# Altium PCB bdcmc25_revised.PcbDoc (part 4 of 4)
Units mm, origin at the board's own origin, x right, y up, seen from the top; angles counter-clockwise.
Board outline 177.8 x 69.85 mm, 4 copper layers (Top Layer, Layer 2 (GND), Layer 3 (GND), Bottom Layer), stack 0.603 mm thick; 363 components, 158 nets, 1074 pads, 732 vias.
Unrouted connection lines stored in the file: 6.
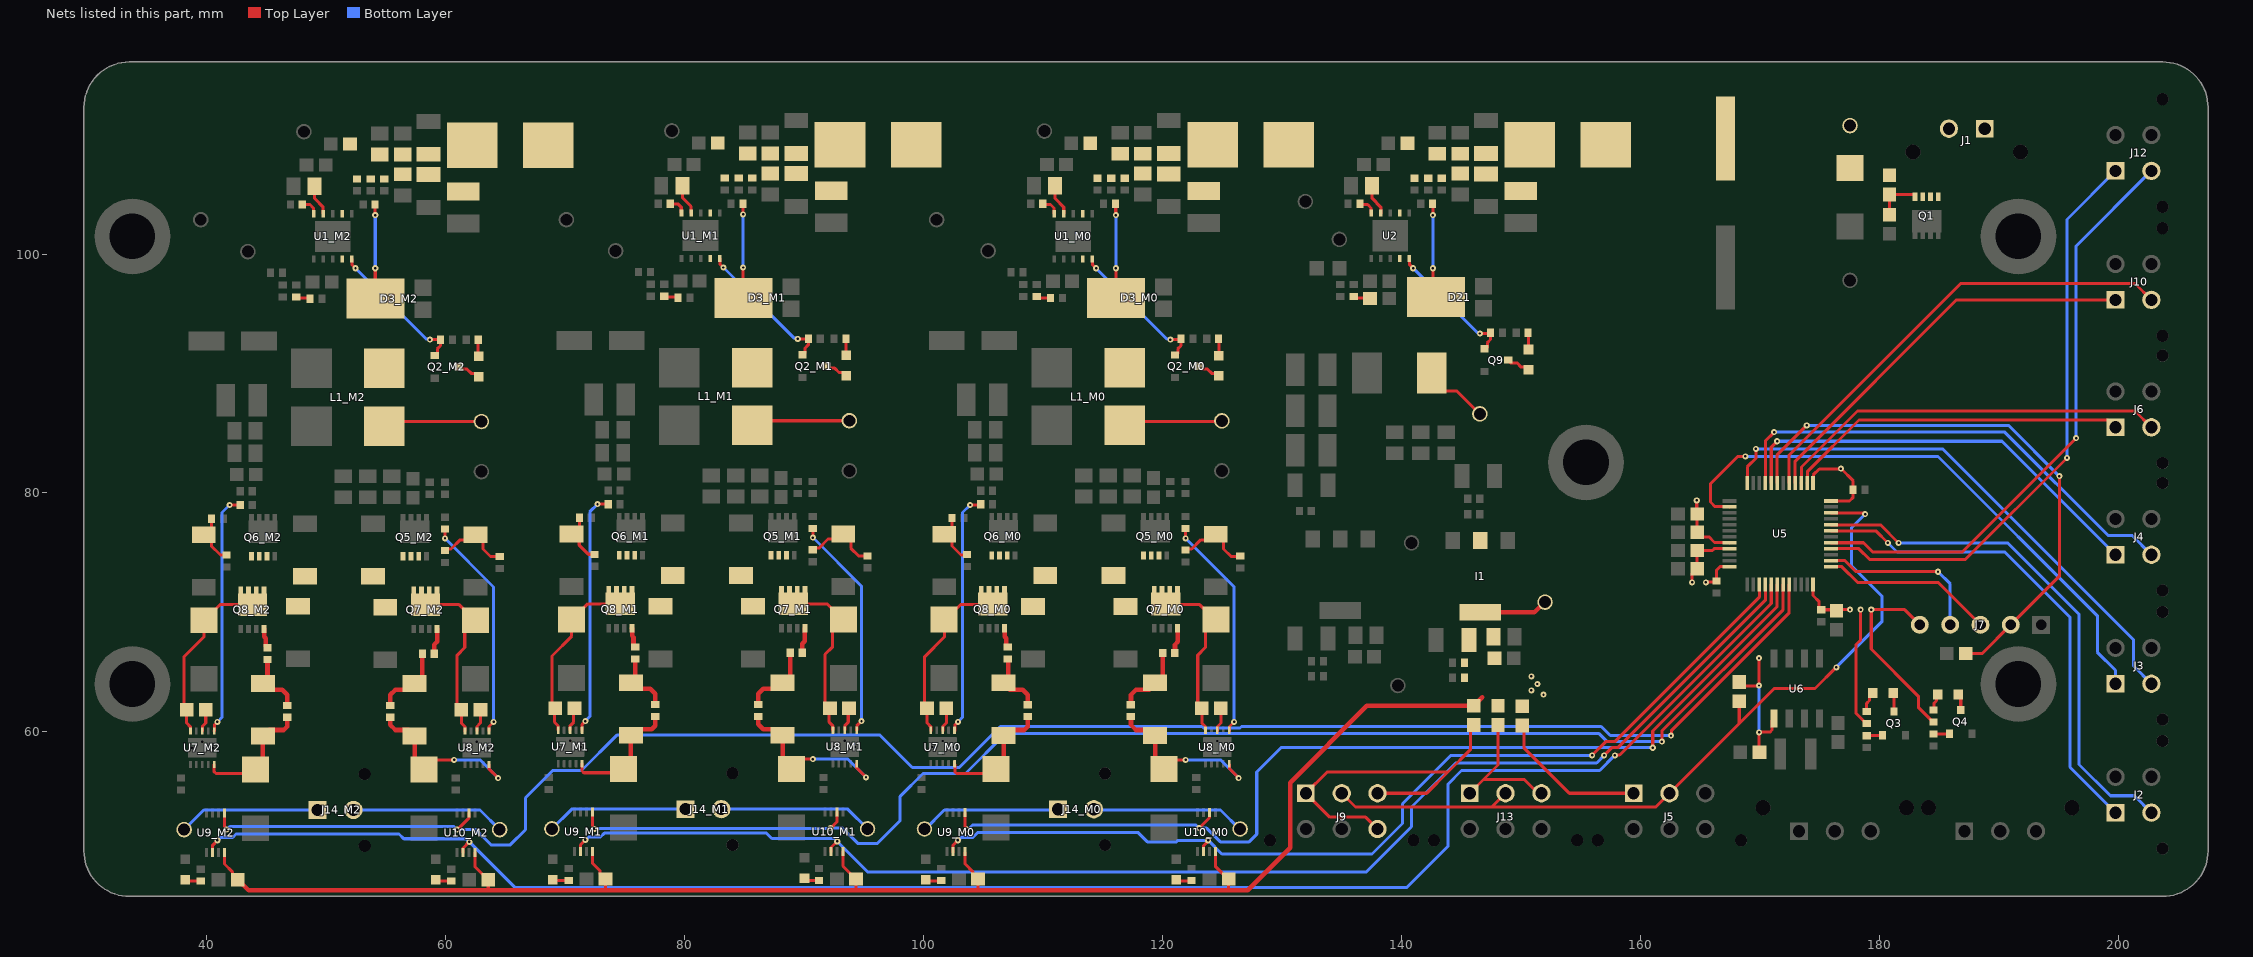
[diagram p5: the nets of this part, all layers, seen from the top]

## Via types
v1: diameter 0.508, hole 0.203, Top Layer to Bottom Layer, 717 vias
v2: diameter 0.508, hole 0.2, Top Layer to Bottom Layer, 15 vias

## Nets (pads, with @x,y where several pads share a name; then routed paths per layer and width w, separated by ;. In a path a pad name is that pad's centre, name@x,y a point inside that pad or via, vN(x,y) a via of type N, cw(c..) or ccw(c..) an arc to the next point about the centre after c; other vN are vias at no path point) (continued)
I2C1_SDA: J5.2 J9.2 J13.2 R14.2 U5.46 | length 69
  Top Layer w0.254: J9.2@135.001,54.864 136.147,53.718 147.571,53.718 ; J13.2@148.717,54.864 147.571,53.718 ; R14.2@168.275,62.573 168.275,60.706 ; U5.46@175.954,78.331 178.676,78.331 178.775,78.232 v1(178.816,78.232) ; v1(176.403,65.405) 174.625,63.627 171.196,63.627 168.275,60.706 ; 147.571,53.718 161.287,53.718 J5.2@162.433,54.864 168.275,60.706
  Bottom Layer w0.254: v1(176.403,65.405) 180.213,69.215 180.213,71.374 177.673,73.914 177.673,77.089 v1(178.816,78.232)
LIMIT_0_A: J6.1@199.771,85.495 U5.2 | length 28.8
  Top Layer w0.254: U5.2@173.954,80.831 173.979,80.856 173.979,81.777 178.308,86.106 199.16,86.106 J6.1@199.771,85.495
LIMIT_0_B: J6.3 U5.3 | length 33.2
  Top Layer w0.254: U5.3@173.454,80.831 173.479,80.856 173.479,82.166 178.181,86.868 201.398,86.868 J6.3@202.771,85.495
LIMIT_1_A: J10.1@199.771,96.163 U5.4 | length 34.2
  Top Layer w0.254: U5.4@172.954,80.831 172.954,82.657 186.46,96.163 J10.1@199.771,96.163
LIMIT_1_B: J10.3 U5.5 | length 39.2
  Top Layer w0.254: U5.5@172.454,80.831 172.454,83.173 186.817,97.536 201.398,97.536 J10.3@202.771,96.163
LIMIT_2_A: J12.1@199.771,106.958 U5.40 | length 49.4
  Top Layer w0.254: U5.40@175.954,75.331 178.288,75.331 179.197,74.422 187.198,74.422 v1(195.707,82.931)
  Bottom Layer w0.254: v1(195.707,82.931) 195.707,102.894 J12.1@199.771,106.958
LIMIT_2_B: J12.3 U5.41 | length 49.8
  Top Layer w0.254: U5.41@175.954,75.831 178.677,75.831 179.451,75.057 186.944,75.057 v1(196.469,84.582)
  Bottom Layer w0.254: v1(196.469,84.582) 196.469,100.656 J12.3@202.771,106.958
LO_1G_M0: D10_M0.2 D12_M0.2 R28_M0.1 U7_M0.10 | length 10.4
  Top Layer w0.254: U7_M0.10@102.613,57.274 102.613,56.664 102.761,56.515 105.606,56.515 D12_M0.2@105.931,56.84
  Top Layer w0.381: D12_M0.2@105.931,56.84 106.693,57.602 106.693,59.649 107.202,60.159 108.431,60.159 108.725,60.452 R28_M0.1@108.725,61.222
LO_1G_M1: D10_M1.2 D12_M1.2 R28_M1.1 U7_M1.10 | length 10.4
  Top Layer w0.254: U7_M1.10@71.417,57.339 71.417,56.729 71.566,56.58 74.41,56.58 D12_M1.2@74.735,56.905
  Top Layer w0.381: D12_M1.2@74.735,56.905 75.497,57.667 D10_M1.2@75.497,59.714 76.007,60.224 77.236,60.224 77.529,60.517 R28_M1.1@77.529,61.287
LO_1G_M2: D10_M2.2 D12_M2.2 R28_M2.1 U7_M2.10 | length 10.4
  Top Layer w0.254: U7_M2.10@40.624,57.274 40.624,56.664 40.773,56.515 43.617,56.515 D12_M2.2@43.942,56.84
  Top Layer w0.381: D12_M2.2@43.942,56.84 44.704,57.602 D10_M2.2@44.704,59.649 45.214,60.159 46.443,60.159 46.736,60.452 R28_M2.1@46.736,61.222
LO_1M_M0: Q8_M0.1 R30_M0.2 | length 1.7
  Top Layer w0.381: Q8_M0.1@106.786,68.612 106.795,68.603 106.795,67.969 106.914,67.851 106.914,67.157 107.024,67.048 R30_M0.2@107.074,67.048
LO_1M_M1: Q8_M1.1 R30_M1.2 | length 1.7
  Top Layer w0.381: Q8_M1.1@75.59,68.677 75.6,68.668 75.6,68.034 75.719,67.916 75.719,67.223 75.828,67.113 R30_M1.2@75.878,67.113
LO_1M_M2: Q8_M2.1 R30_M2.2 | length 1.7
  Top Layer w0.381: Q8_M2.1@44.797,68.612 44.807,68.603 44.807,67.969 44.925,67.851 44.925,67.157 45.035,67.048 R30_M2.2@45.085,67.048
LO_2G_M0: D11_M0.2 D15_M0.2 R29_M0.1 U8_M0.10 | length 14.8
  Top Layer w0.254: D15_M0.2@120.155,56.84 120.973,57.658 v1(121.933,57.658) ; U8_M0.10@125.6,57.274 125.6,56.912 v1(126.378,56.134)
  Top Layer w0.381: R29_M0.1@117.361,61.222 117.361,60.579 117.781,60.159 118.883,60.159 119.393,59.649 119.393,57.602 D15_M0.2@120.155,56.84
  Bottom Layer w0.254: v1(121.933,57.658) 124.854,57.658 v1(126.378,56.134)
LO_2G_M1: D11_M1.2 D15_M1.2 R29_M1.1 U8_M1.10 | length 14.8
  Top Layer w0.254: D15_M1.2@88.959,56.905 89.777,57.723 v1(90.737,57.723) ; U8_M1.10@94.404,57.339 94.404,56.977 v1(95.182,56.199)
  Top Layer w0.381: R29_M1.1@86.165,61.287 86.165,60.644 86.586,60.224 87.688,60.224 D11_M1.2@88.197,59.714 88.197,57.667 D15_M1.2@88.959,56.905
  Bottom Layer w0.254: v1(90.737,57.723) 93.658,57.723 v1(95.182,56.199)
LO_2G_M2: D11_M2.2 D15_M2.2 R29_M2.1 U8_M2.10 | length 14.8
  Top Layer w0.254: D15_M2.2@58.166,56.84 58.984,57.658 v1(60.706,57.658) ; U8_M2.10@63.611,57.274 63.611,56.912 v1(64.389,56.134)
  Top Layer w0.381: R29_M2.1@55.372,61.222 55.372,60.579 55.792,60.159 56.894,60.159 D11_M2.2@57.404,59.649 57.404,57.602 D15_M2.2@58.166,56.84
  Bottom Layer w0.254: v1(60.706,57.658) 62.865,57.658 v1(64.389,56.134)
LO_2M_M0: Q7_M0.1 R31_M0.1 | length 2.2
  Top Layer w0.381: R31_M0.1@121.036,66.548 121.044,66.556 121.044,67.31 121.264,67.53 Q7_M0.1@121.264,68.612
LO_2M_M1: Q7_M1.1 R31_M1.1 | length 2.2
  Top Layer w0.381: R31_M1.1@89.84,66.613 89.848,66.621 89.848,67.375 90.068,67.595 Q7_M1.1@90.068,68.677
LO_2M_M2: Q7_M2.1 R31_M2.1 | length 2.2
  Top Layer w0.381: R31_M2.1@59.047,66.548 59.055,66.556 59.055,67.31 59.275,67.53 Q7_M2.1@59.275,68.612
M+_M0: +. +.1 C60_M0.2 C60_M1.2 C60_M2.2 D8_M0.1 D8_M1.1 D8_M2.1 D13_M0.1 D13_M1.1 D13_M2.1 D16_M0.2 D16_M1.2 D16_M2.2 J14_M0.1@111.252,53.523 J14_M1.1@80.069,53.532 J14_M2.1@49.276,53.467 Q6_M0.2 Q6_M1.2 Q6_M2.2 Q8_M0.3 Q8_M1.3 Q8_M2.3 U7_M0.5 U7_M1.5 U7_M2.5 | length 79.9
  Top Layer w0.254: U7_M2.5@38.624,60.074 38.624,60.436 38.316,60.744 38.316,61.976 38.1,62.192 38.1,66.294 39.751,67.945 D13_M2.1@39.751,69.345 39.801,69.345 41.108,70.652 Q8_M2.3@43.822,70.652 ; U7_M1.5@69.417,60.139 69.417,60.501 69.109,60.809 69.109,62.041 68.893,62.257 68.893,66.359 70.544,68.01 D13_M1.1@70.544,69.41 70.594,69.41 71.901,70.717 Q8_M1.3@74.615,70.717 ; U7_M0.5@100.613,60.074 100.613,60.436 100.305,60.744 100.305,61.976 100.089,62.192 100.089,66.294 101.74,67.945 101.74,69.345 101.79,69.345 103.097,70.652 Q8_M0.3@105.811,70.652
  Bottom Layer w0.254: +.@38.1,51.816 39.751,53.467 J14_M2.1@49.276,53.467 ; +.1@68.893,51.881 70.544,53.532 J14_M1.1@80.069,53.532 ; +.1@100.089,51.816 101.74,53.467 J14_M0.1@111.265,53.467
M-_M0: -.1 C61_M0.2 C61_M1.2 C61_M2.2 D9_M0.1 D9_M1.1 D9_M2.1 D14_M0.1 D14_M1.1 D14_M2.1 D17_M0.2 D17_M1.2 D17_M2.2 J14_M0.2 J14_M1.2 J14_M2.2 Q5_M0.2 Q5_M1.2 Q5_M2.2 Q7_M0.3 Q7_M1.3 Q7_M2.3 U8_M0.5 U8_M1.5 U8_M2.5 | length 83.4
  Top Layer w0.254: Q7_M2.3@58.3,70.652 61.127,70.652 D14_M2.1@62.434,69.345 ; U8_M2.5@61.611,60.074 61.604,60.081 61.604,60.443 61.303,60.744 61.303,61.976 60.96,62.319 60.96,66.421 61.595,67.056 61.595,68.506 D14_M2.1@62.434,69.345 ; D14_M2.1@62.484,69.345 D14_M2.1@62.434,69.345 ; Q7_M1.3@89.093,70.717 91.92,70.717 D14_M1.1@93.227,69.41 ; U8_M1.5@92.404,60.139 92.397,60.146 92.397,60.508 92.096,60.809 92.096,62.041 91.753,62.384 91.753,66.486 92.388,67.121 92.388,68.571 D14_M1.1@93.227,69.41 ; D14_M1.1@93.277,69.41 D14_M1.1@93.227,69.41 ; Q7_M0.3@120.289,70.652 123.116,70.652 D14_M0.1@124.423,69.345 ; U8_M0.5@123.6,60.074 123.593,60.081 123.593,60.443 123.292,60.744 123.292,61.976 122.949,62.319 122.949,66.421 123.584,67.056 123.584,68.506 D14_M0.1@124.423,69.345 ; D14_M0.1@124.473,69.345 D14_M0.1@124.423,69.345
  Bottom Layer w0.254: J14_M2.2@52.276,53.467 62.865,53.467 -.1@64.516,51.816 ; J14_M1.2@83.069,53.532 93.658,53.532 -.1@95.309,51.881 ; J14_M0.2@114.265,53.467 124.854,53.467 -.1@126.505,51.816
MOTOR_DIR_M0: U5.27 U9_M0.6 U10_M0.6 | length 81.1
  Top Layer w0.254: U9_M0.6@102.465,49.913 102.465,50.522 v1(102.87,50.927) ; U10_M0.6@123.438,50.217 123.438,50.471 123.825,50.858 v1(123.825,50.927) ; v1(155.956,58.039) 157.099,59.182 157.861,59.182 169.954,71.275 U5.27@169.954,72.331
  Bottom Layer w0.254: v1@102.892,50.927 103.146,51.181 104.14,51.181 104.521,51.562 117.968,51.562 118.73,50.8 121.18,50.8 121.307,50.927 v1(123.825,50.927) 124.968,49.784 137.541,49.784 140.081,52.324 140.081,53.975 144.145,58.039 v1(155.956,58.039)
MOTOR_DIR_M1: U5.28 U9_M1.6 U10_M1.6 | length 114.3
  Top Layer w0.254: U9_M1.6@71.284,49.942 71.284,50.551 v1(71.689,50.956) ; U10_M1.6@92.257,49.944 92.257,50.315 v1(92.771,50.829) ; v1(156.972,58.039) 157.607,58.674 158.115,58.674 170.454,71.013 U5.28@170.454,72.331
  Bottom Layer w0.254: v1@71.711,50.956 71.965,51.21 72.959,51.21 73.275,51.525 86.853,51.525 87.295,51.083 92.496,51.083 v1@92.75,50.829 ; v1(92.771,50.829) 95.34,48.26 137.033,48.26 140.843,52.07 140.843,53.721 144.526,57.404 156.337,57.404 v1(156.972,58.039)
MOTOR_DIR_M2: U5.29 U9_M2.6 U10_M2.6 | length 148.9
  Top Layer w0.254: U9_M2.6@40.489,49.913 40.489,50.522 v1(40.894,50.927) ; U10_M2.6@61.46,49.913 61.462,49.915 61.462,50.286 v1(61.976,50.8) ; v1(157.861,58.039) 157.89,58.068 158.271,58.068 170.954,70.751 U5.29@170.954,72.331
  Bottom Layer w0.254: v1(40.894,50.927) 40.916,50.927 41.17,51.181 42.164,51.181 42.443,51.46 56.094,51.46 56.5,51.054 61.7,51.054 61.954,50.8 v1(61.976,50.8) 65.786,46.99 140.462,46.99 143.891,50.419 143.891,55.626 145.034,56.769 156.591,56.769 v1(157.861,58.039)
NetC29_M0_2: C29_M0.2 R8_M0.1 | length 1.2
  Top Layer w0.254: R8_M0.1@109.487,96.401 109.554,96.334 110.57,96.334 C29_M0.2@110.638,96.266
NetC29_M1_2: C29_M1.2 R8_M1.1 | length 1.2
  Top Layer w0.254: R8_M1.1@78.291,96.466 78.359,96.399 79.375,96.399 C29_M1.2@79.442,96.331
NetC29_M2_2: C29_M2.2 R8_M2.1 | length 1.2
  Top Layer w0.254: R8_M2.1@47.498,96.401 47.566,96.334 48.582,96.334 C29_M2.2@48.649,96.266
NetC60_M0_1: C60_M0.1 U7_M0.3 | length 1.9
  Top Layer w0.254: U7_M0.3@101.613,60.074 101.613,60.452 101.905,60.744 C60_M0.1@101.905,61.849
NetC60_M1_1: C60_M1.1 U7_M1.3 | length 1.9
  Top Layer w0.254: U7_M1.3@70.417,60.139 70.417,60.517 70.709,60.809 C60_M1.1@70.709,61.914
NetC60_M2_1: C60_M2.1 U7_M2.3 | length 1.9
  Top Layer w0.254: U7_M2.3@39.624,60.074 39.624,60.452 39.916,60.744 C60_M2.1@39.916,61.849
NetC61_M0_1: C61_M0.1 U8_M0.3 | length 2
  Top Layer w0.254: U8_M0.3@124.6,60.074 124.607,60.081 124.607,60.459 124.892,60.744 C61_M0.1@124.892,61.976
NetC61_M1_1: C61_M1.1 U8_M1.3 | length 2
  Top Layer w0.254: U8_M1.3@93.404,60.139 93.411,60.146 93.411,60.524 93.696,60.809 C61_M1.1@93.696,62.041
NetC61_M2_1: C61_M2.1 U8_M2.3 | length 2
  Top Layer w0.254: U8_M2.3@62.611,60.074 62.618,60.081 62.618,60.459 62.903,60.744 C61_M2.1@62.903,61.976
NetC81_1: C81.1 R36.1 | length 1.2
  Top Layer w0.254: R36.1@136.03,96.401 136.097,96.334 137.113,96.334 C81.1@137.181,96.266
NetD2_M0_1: D2_M0.1 R3_M0.1 | length 1.4
  Top Layer w0.254: R3_M0.1@124.711,92.837 124.711,91.472 D2_M0.1@124.737,91.445
NetD2_M0_2: D2_M0.2 Q2_M0.3 | length 2
  Top Layer w0.254: Q2_M0.3@123.06,90.551 123.233,90.378 123.757,90.378 124.119,90.016 124.464,90.016 D2_M0.2@124.737,89.743
NetD2_M1_1: D2_M1.1 R3_M1.1 | length 1.4
  Top Layer w0.254: R3_M1.1@93.515,92.902 93.515,91.537 D2_M1.1@93.542,91.51
NetD2_M1_2: D2_M1.2 Q2_M1.3 | length 2
  Top Layer w0.254: Q2_M1.3@91.864,90.616 92.037,90.443 92.561,90.443 92.923,90.081 93.269,90.081 D2_M1.2@93.542,89.808
NetD2_M2_1: D2_M2.1 R3_M2.1 | length 1.4
  Top Layer w0.254: R3_M2.1@62.722,92.837 62.722,91.472 D2_M2.1@62.749,91.445
NetD2_M2_2: D2_M2.2 Q2_M2.3 | length 2
  Top Layer w0.254: Q2_M2.3@61.071,90.551 61.244,90.378 61.768,90.378 62.13,90.016 62.476,90.016 D2_M2.2@62.749,89.743
NetD4_1: D4.1 R18.1 | length 1.8
  Top Layer w0.254: R18.1@178.943,61.714 178.943,62.395 179.173,62.625 179.173,62.984 D4.1@179.446,63.257
NetD4_2: D4.2 Q3.3 | length 1.9
  Top Layer w0.254: D4.2@180.91,63.019 D4.2@181.148,63.257 181.229,63.176 Q3.3@181.229,61.706
NetD5_1: D5.1 R19.1 | length 1.8
  Top Layer w0.254: R19.1@184.531,61.841 184.581,61.891 184.581,62.407 184.785,62.611 184.785,63.135 D5.1@185.034,63.384
NetD5_2: D5.2 Q4.3 | length 1.6
  Top Layer w0.254: D5.2@186.736,63.384 186.817,63.303 Q4.3@186.817,61.833
NetD6_M0_1: D6_M0.1 R22_M0.2 R23_M0.1 | length 4.4
  Top Layer w0.254: D6_M0.1@101.74,76.495 D6_M0.1@101.802,76.495 ; R23_M0.1@102.383,77.851 102.383,77.068 101.81,76.495 D6_M0.1@101.802,76.495 ; R22_M0.2@103.645,74.795 103.637,74.803 103.137,74.803 102.375,75.565 102.375,75.922 D6_M0.1@101.802,76.495
NetD6_M1_1: D6_M1.1 R22_M1.2 R23_M1.1 | length 4.4
  Top Layer w0.254: D6_M1.1@70.544,76.56 D6_M1.1@70.606,76.56 ; R23_M1.1@71.187,77.916 71.187,77.133 70.614,76.56 D6_M1.1@70.606,76.56 ; R22_M1.2@72.449,74.86 72.441,74.868 71.941,74.868 71.179,75.63 71.179,75.987 D6_M1.1@70.606,76.56
NetD6_M2_1: D6_M2.1 R22_M2.2 R23_M2.1 | length 4.4
  Top Layer w0.254: D6_M2.1@39.751,76.495 D6_M2.1@39.813,76.495 ; R23_M2.1@40.394,77.851 40.394,77.068 39.821,76.495 D6_M2.1@39.813,76.495 ; R22_M2.2@41.656,74.795 41.648,74.803 41.148,74.803 40.386,75.565 40.386,75.922 D6_M2.1@39.813,76.495
NetD7_M0_1: D7_M0.1 R24_M0.2 R25_M0.2 | length 6.2
  Top Layer w0.254: R24_M0.2@121.933,75.176 122.068,75.311 122.441,75.311 123.203,76.073 D7_M0.1@124.178,76.073 ; D7_M0.1@124.178,76.2 124.473,76.495 124.535,76.495 125.108,75.922 125.108,75.311 125.743,74.676 126.497,74.676 R25_M0.2@126.505,74.668
NetD7_M1_1: D7_M1.1 R24_M1.2 R25_M1.2 | length 6.2
  Top Layer w0.254: R24_M1.2@90.737,75.241 90.872,75.376 91.245,75.376 92.007,76.138 D7_M1.1@92.982,76.138 ; D7_M1.1@92.982,76.265 D7_M1.1@93.277,76.56 93.339,76.56 93.912,75.987 93.912,75.376 94.547,74.741 95.301,74.741 R25_M1.2@95.309,74.733
NetD7_M2_1: D7_M2.1 R24_M2.2 R25_M2.2 | length 6.2
  Top Layer w0.254: R24_M2.2@59.944,75.176 60.079,75.311 60.452,75.311 61.214,76.073 D7_M2.1@62.189,76.073 ; D7_M2.1@62.189,76.2 D7_M2.1@62.484,76.495 62.546,76.495 63.119,75.922 63.119,75.311 63.754,74.676 64.508,74.676 R25_M2.2@64.516,74.668
NetD10_M0_1: D10_M0.1 R28_M0.2 R30_M0.1 | length 5.5
  Top Layer w0.381: R30_M0.1@107.074,66.048 107.074,64.43 106.693,64.049 107.202,63.539 108.304,63.539 108.725,63.119 R28_M0.2@108.725,62.222
NetD10_M1_1: D10_M1.1 R28_M1.2 R30_M1.1 | length 5.5
  Top Layer w0.381: R30_M1.1@75.878,66.113 75.878,64.495 D10_M1.1@75.497,64.114 76.007,63.605 77.109,63.605 77.529,63.184 R28_M1.2@77.529,62.287
NetD10_M2_1: D10_M2.1 R28_M2.2 R30_M2.1 | length 5.5
  Top Layer w0.381: R30_M2.1@45.085,66.048 45.085,64.43 D10_M2.1@44.704,64.049 45.214,63.539 46.316,63.539 46.736,63.119 R28_M2.2@46.736,62.222
NetD11_M0_1: D11_M0.1 R29_M0.2 R31_M0.2 | length 6.2
  Top Layer w0.381: R29_M0.2@117.361,62.222 117.361,63.119 117.781,63.539 118.883,63.539 119.393,64.049 119.526,64.049 120.036,64.559 R31_M0.2@120.036,66.548
NetD11_M1_1: D11_M1.1 R29_M1.2 R31_M1.2 | length 6.2
  Top Layer w0.381: R29_M1.2@86.165,62.287 86.165,63.184 86.586,63.605 87.688,63.605 D11_M1.1@88.197,64.114 88.331,64.114 88.84,64.624 R31_M1.2@88.84,66.613
NetD11_M2_1: D11_M2.1 R29_M2.2 R31_M2.2 | length 6.2
  Top Layer w0.381: R29_M2.2@55.372,62.222 55.372,63.119 55.792,63.539 56.894,63.539 D11_M2.1@57.404,64.049 57.537,64.049 58.047,64.559 R31_M2.2@58.047,66.548
NetD18_M0_1: D18_M0.1 R32_M0.2 | length 1.3
  Top Layer w0.254: D18_M0.1@100.192,47.506 R32_M0.2@101.486,47.506
NetD18_M1_1: D18_M1.1 R32_M1.2 | length 0.9
  Top Layer w0.254: 69.403,47.571 69.469,47.571 R32_M1.2@70.29,47.571
NetD18_M2_1: D18_M2.1 R32_M2.2 | length 0.9
  Top Layer w0.254: D18_M2.1@38.61,47.506 R32_M2.2@39.497,47.506
NetD19_M0_1: D19_M0.1 R33_M0.2 | length 1.3
  Top Layer w0.254: D19_M0.1@121.147,47.506 R33_M0.2@122.441,47.506
NetD19_M1_1: D19_M1.1 R33_M1.2 | length 1.2
  Top Layer w0.254: D19_M1.1@90.032,47.571 R33_M1.2@91.245,47.571
NetD19_M2_1: D19_M2.1 R33_M2.2 | length 1.3
  Top Layer w0.254: D19_M2.1@59.171,47.506 R33_M2.2@60.452,47.506
NetD20_1: D20.1 R11.1 | length 1.4
  Top Layer w0.254: R11.1@150.619,93.345 150.619,91.98 D20.1@150.645,91.953
NetD20_2: D20.2 Q9.3 | length 2
  Top Layer w0.254: Q9.3@148.968,91.059 149.141,90.886 149.665,90.886 150.027,90.524 150.372,90.524 D20.2@150.645,90.251
NetF2_2: F2.2 J5.1 | length 12.8
  Top Layer w0.254: F2.2@150.241,60.706 150.241,58.674 154.051,54.864 J5.1@159.433,54.864
NetF3_2: F3.2 J9.1 J9.3 J9.6 | length 31.3
  Top Layer w0.254: J9.6@138.001,51.864 137.007,52.858 134.007,52.858 J9.1@132.001,54.864 133.779,56.642 143.891,56.642 ; J9.3@138.001,54.864 142.113,54.864 143.891,56.642 ; F3.2@146.05,60.579 145.796,60.325 145.796,58.547 143.891,56.642
NetF4_2: F4.2 J13.1 J13.3 | length 12
  Top Layer w0.254: J13.1@145.717,54.864 146.86,56.007 ; F4.2@148.082,60.579 148.082,57.229 146.86,56.007 ; J13.3@151.717,54.864 151.428,54.864 150.285,56.007 146.86,56.007
NetJ1_1: J1.1@188.825,110.49 Q1.2
NetQ1_1: Q1.1 R1.2 R2.1 | length 4
  Top Layer w0.254: R2.1@180.848,103.289 R1.2@180.848,104.991 182.916,104.991 182.989,104.918 Q1.1@182.989,104.787
NetQ3_1: Q3.1 R16.1 | length 1.4
  Top Layer w0.254: R16.1@178.884,59.741 R16.1@178.943,59.682 178.955,59.694 180.267,59.694 Q3.1@180.279,59.706
NetQ4_1: Q4.1 R17.1 | length 1.4
  Top Layer w0.254: R17.1@184.472,59.868 R17.1@184.531,59.809 184.543,59.821 185.855,59.821 Q4.1@185.867,59.833
NetR26_M0_1: R26_M0.1 U8_M0.1 | length 18.7
  Top Layer w0.254: v1(121.933,76.2) R26_M0.1@121.933,76.97 ; U8_M0.1@125.6,60.074 125.607,60.081 125.607,60.443 v1(125.997,60.833)
  Bottom Layer w0.254: v1(121.933,76.2) 125.997,72.136 v1(125.997,60.833)
NetR26_M1_1: R26_M1.1 U8_M1.1 | length 18.7
  Top Layer w0.254: v1(90.737,76.265) R26_M1.1@90.737,77.035 ; U8_M1.1@94.404,60.139 94.411,60.146 94.411,60.508 v1(94.801,60.898)
  Bottom Layer w0.254: v1(90.737,76.265) 94.801,72.201 v1(94.801,60.898)
NetR26_M2_1: R26_M2.1 U8_M2.1 | length 18.7
  Top Layer w0.254: v1(59.944,76.2) R26_M2.1@59.944,76.97 ; U8_M2.1@63.611,60.074 63.618,60.081 63.618,60.443 v1(64.008,60.833)
  Bottom Layer w0.254: v1(59.944,76.2) 64.008,72.136 v1(64.008,60.833)
NetR27_M0_1: R27_M0.1 U7_M0.1 | length 20.4
  Top Layer w0.254: U7_M0.1@102.613,60.074 102.62,60.081 102.62,60.57 102.881,60.831 v1(102.881,60.835) ; v1(103.899,78.994) R27_M0.1@104.796,78.994
  Bottom Layer w0.254: v1(102.881,60.835) 102.885,60.835 103.264,61.214 103.264,78.359 v1(103.899,78.994)
NetR27_M1_1: R27_M1.1 U7_M1.1 | length 20.4
  Top Layer w0.254: U7_M1.1@71.417,60.139 71.424,60.146 71.424,60.635 71.685,60.896 v1(71.685,60.9) ; v1(72.703,79.059) R27_M1.1@73.6,79.059
  Bottom Layer w0.254: v1(71.685,60.9) 71.689,60.9 72.068,61.279 72.068,78.424 v1(72.703,79.059)
NetR27_M2_1: R27_M2.1 U7_M2.1 | length 20.4
  Top Layer w0.254: U7_M2.1@40.624,60.074 40.631,60.081 40.631,60.57 40.892,60.831 v1(40.892,60.835) ; v1(41.91,78.994) R27_M2.1@42.807,78.994
  Bottom Layer w0.254: v1(40.892,60.835) 40.896,60.835 41.275,61.214 41.275,78.359 v1(41.91,78.994)
NRST: C82.2 J7.2 U5.7 | length 47.7
  Top Layer w0.254: U5.7@171.454,80.831 171.454,83.189 v1(173.927,85.661) ; C82.2@187.236,66.548 188.595,66.548 J7.2@191.008,68.961 195.072,73.025 v1(195.072,81.407)
  Bottom Layer w0.254: v1(173.927,85.661) 190.817,85.661 v1(195.072,81.407)
PGOOD_2: Q9.1 R13.1 U2.10 | length 11.2
  Top Layer w0.254: U2.10@140.678,99.573 140.687,99.564 140.687,99.102 v1(140.983,98.806) ; v1(146.571,93.345) 147.46,93.345 147.46,92.837 147.191,92.568 147.191,92.182 147.018,92.009 Q9.1@146.968,92.009
  Bottom Layer w0.254: v1(140.983,98.806) 146.395,93.394 146.522,93.394 v1(146.571,93.345)
PGOOD_M0: Q2_M0.1 R5_M0.1 U1_M0.10 | length 12
  Top Layer w0.254: U1_M0.10@114.135,99.573 114.144,99.564 114.144,99.102 v1(114.44,98.806) ; v1(120.663,92.837) 121.552,92.837 121.552,92.329 121.283,92.06 121.283,91.674 121.11,91.501 Q2_M0.1@121.06,91.501
  Bottom Layer w0.254: v1(114.44,98.806) 120.36,92.886 120.614,92.886 v1(120.663,92.837)
PGOOD_M1: Q2_M1.1 R5_M1.1 U1_M1.10 | length 12
  Top Layer w0.254: U1_M1.10@82.939,99.638 82.949,99.629 82.949,99.167 v1(83.244,98.871) ; v1(89.467,92.902) R5_M1.1@90.356,92.902 90.356,92.394 90.087,92.125 90.087,91.739 89.914,91.566 Q2_M1.1@89.864,91.566
  Bottom Layer w0.254: v1(83.244,98.871) 89.165,92.951 89.419,92.951 v1(89.467,92.902)
PGOOD_M2: Q2_M2.1 R5_M2.1 U1_M2.10 | length 12
  Top Layer w0.254: U1_M2.10@52.146,99.573 52.155,99.564 52.155,99.102 v1(52.451,98.806) ; v1(58.674,92.837) R5_M2.1@59.563,92.837 59.563,92.329 59.294,92.06 59.294,91.674 59.121,91.501 Q2_M2.1@59.071,91.501
  Bottom Layer w0.254: v1(52.451,98.806) 58.371,92.886 58.625,92.886 v1(58.674,92.837)
PWM_IN_M0: U5.30 U9_M0.1 U10_M0.2 | length 85.3
  Top Layer w0.254: U9_M0.1@103.478,53.213 103.478,52.052 103.645,51.885 v1(103.645,51.816) ; v1(123.063,51.943) 123.936,52.816 U10_M0.2@123.936,53.021 ; v1(161.036,58.674) 161.036,60.071 171.454,70.489 U5.30@171.454,72.331
  Bottom Layer w0.254: v1(103.645,51.816) 103.713,51.816 104.094,52.197 122.787,52.197 123.041,51.943 123.698,51.943 124.841,50.8 127.254,50.8 127.889,51.435 127.889,56.642 129.921,58.674 v1(161.036,58.674)
PWM_IN_M1: U5.31 U9_M1.1 U10_M1.2 | length 115.6
  Top Layer w0.254: U9_M1.1@72.282,53.278 72.282,52.117 72.449,51.95 v1(72.449,51.881) ; v1(92.202,51.943) 92.227,51.943 92.753,52.469 U10_M1.2@92.753,53.278 ; v1(161.798,59.182) 161.798,60.071 171.954,70.227 U5.31@171.954,72.331
  Bottom Layer w0.254: v1(72.449,51.881) 72.48,51.912 92.171,51.912 v1(92.202,51.943) 93.218,51.943 94.488,50.673 96.139,50.673 98.044,52.578 98.044,54.61 99.949,56.515 103.505,56.515 106.843,59.853 156.555,59.853 157.226,59.182 v1(161.798,59.182)
PWM_IN_M2: U5.32 U9_M2.1 U10_M2.2 | length 150
  Top Layer w0.254: U9_M2.1@41.489,53.213 41.489,52.052 41.656,51.885 v1(41.656,51.816) ; v1(60.96,51.816) 61.96,52.816 U10_M2.2@61.96,53.213 ; v1(162.56,59.69) 162.589,59.719 162.589,60.1 172.454,69.965 U5.32@172.454,72.331
  Bottom Layer w0.254: v1(41.656,51.816) 41.678,51.816 41.932,52.07 60.684,52.07 60.938,51.816 62.515,51.816 63.785,50.546 65.405,50.546 66.675,51.816 66.675,54.483 68.961,56.769 71.374,56.769 74.329,59.724 96.359,59.724 99.06,57.023 102.997,57.023 106.426,60.452 123.317,60.452 123.452,60.317 126.484,60.317 126.619,60.452 156.718,60.452 157.48,59.69 v1(162.56,59.69)
QUAD_0_A: J2.1@199.771,53.237 U5.43 | length 40.9
  Top Layer w0.254: U5.43@175.954,76.831 179.709,76.831 v1(180.721,75.819)
  Bottom Layer w0.254: v1(180.721,75.819) 181.483,75.057 190.5,75.057 195.961,69.596 195.961,57.047 J2.1@199.771,53.237
QUAD_0_B: J2.3 U5.44 | length 44.2
  Top Layer w0.254: U5.44@175.954,77.331 180.098,77.331 v1(181.61,75.819)
  Bottom Layer w0.254: v1(181.61,75.819) 190.754,75.819 196.723,69.85 196.723,57.277 199.347,54.653 201.355,54.653 J2.3@202.771,53.237
QUAD_1_A: J3.1@199.771,64.032 U5.14 | length 48.5
  Top Layer w0.254: U5.14@167.454,78.831 167.429,78.856 166.254,78.856 165.862,79.248 165.862,80.772 168.148,83.058 v1(168.783,83.058)
  Bottom Layer w0.254: v1(168.783,83.058) 184.912,83.058 198.247,69.723 198.247,66.675 199.771,65.151 J3.1@199.771,64.032
QUAD_1_B: J3.3 U5.12 | length 45.7
  Top Layer w0.254: U5.12@168.954,80.831 168.954,82.181 169.672,82.899 v1(169.672,83.693)
  Bottom Layer w0.254: v1(169.672,83.693) 185.293,83.693 201.295,67.691 201.295,65.508 J3.3@202.771,64.032
QUAD_2_A: J4.1@199.771,74.827 U5.8 | length 36
  Top Layer w0.254: U5.8@170.954,80.831 170.954,83.832 v1(171.45,84.328)
  Bottom Layer w0.254: v1(171.45,84.328) 190.27,84.328 J4.1@199.771,74.827
QUAD_2_B: J4.3 U5.9 | length 40.4
  Top Layer w0.254: U5.9@170.454,80.831 170.454,84.348 v1(171.196,85.09)
  Bottom Layer w0.254: v1(171.196,85.09) 190.5,85.09 199.136,76.454 201.144,76.454 J4.3@202.771,74.827
RTCLK_2: R37.2 U2.5 | length 1.5
  Top Layer w0.254: R37.2@136.53,104.14 137.173,104.14 137.455,103.858 137.455,103.396 U2.5@137.478,103.373
RTCLK_M0: R9_M0.2 U1_M0.5 | length 1.5
  Top Layer w0.254: R9_M0.2@109.987,104.14 110.63,104.14 110.912,103.858 110.912,103.396 U1_M0.5@110.935,103.373
RTCLK_M1: R9_M1.2 U1_M1.5 | length 1.5
  Top Layer w0.254: R9_M1.2@78.791,104.205 79.434,104.205 79.716,103.923 79.716,103.461 U1_M1.5@79.739,103.438
RTCLK_M2: R9_M2.2 U1_M2.5 | length 1.5
  Top Layer w0.254: R9_M2.2@47.998,104.14 48.641,104.14 48.923,103.858 48.923,103.396 U1_M2.5@48.946,103.373
SSTR_2: C79.2 U2.4 | length 2.6
  Top Layer w0.254: C79.2@137.545,105.664 137.545,104.657 138.278,103.924 U2.4@138.278,103.373
SSTR_M0: C27_M0.2 U1_M0.4 | length 2.6
  Top Layer w0.254: C27_M0.2@111.002,105.664 111.002,104.657 111.735,103.924 U1_M0.4@111.735,103.373
SSTR_M1: C27_M1.2 U1_M1.4 | length 2.6
  Top Layer w0.254: C27_M1.2@79.806,105.729 79.806,104.722 80.539,103.989 U1_M1.4@80.539,103.438
SSTR_M2: C27_M2.2 U1_M2.4 | length 2.6
  Top Layer w0.254: C27_M2.2@49.013,105.664 49.013,104.657 49.746,103.924 U1_M2.4@49.746,103.373
SW_2: C74.2 D21.2 L2.1 SW.1@146.558,86.614 U2.9 | length 13.6
  Top Layer w0.254: L2.1@142.545,90.043 142.545,89.637 143.662,88.519 144.653,88.519 SW.1@146.558,86.614 ; C74.2@142.626,104.14 142.63,104.136 142.63,103.255 v1(142.634,103.251) ; v1(142.634,98.806) 142.634,96.283 D21.2@142.651,96.266
  Bottom Layer w0.254: v1(142.634,98.806) v1(142.634,103.251)
SW_M0: C23_M0.2 D3_M0.2 L1_M0.1 SW.1@124.968,86.035 U1_M0.9 | length 16.2
  Top Layer w0.254: C23_M0.2@116.083,104.14 116.087,104.136 116.087,103.255 v1(116.091,103.251) ; v1(116.091,98.806) 116.091,96.283 D3_M0.2@116.108,96.266 ; L1_M0.1@116.853,85.598 117.234,85.979 SW.1@124.981,85.979
  Bottom Layer w0.254: v1(116.091,98.806) v1(116.091,103.251)
SW_M1: C23_M1.2 D3_M1.2 L1_M1.1 SW.1@93.785,86.044 U1_M1.9 | length 16.2
  Top Layer w0.254: C23_M1.2@84.887,104.205 84.891,104.201 84.891,103.32 v1(84.895,103.316) ; v1(84.895,98.871) 84.895,96.348 D3_M1.2@84.912,96.331 ; L1_M1.1@85.657,85.663 86.038,86.044 SW.1@93.785,86.044
  Bottom Layer w0.254: v1(84.895,98.871) v1(84.895,103.316)
SW_M2: C23_M2.2 D3_M2.2 L1_M2.1 SW.1@62.992,85.979 U1_M2.9 | length 16.2
  Top Layer w0.254: C23_M2.2@54.094,104.14 54.098,104.136 54.098,103.255 v1(54.102,103.251) ; v1(54.102,98.806) 54.102,96.283 D3_M2.2@54.119,96.266 ; L1_M2.1@54.864,85.598 55.245,85.979 SW.1@62.992,85.979
  Bottom Layer w0.254: v1(54.102,98.806) v1(54.102,103.251)
SWCLK: J7.4 U5.38 | length 14.2
  Top Layer w0.254: U5.38@175.954,74.331 177.129,74.331 178.054,73.406 v1(184.912,73.406)
  Bottom Layer w0.254: v1(184.912,73.406) 185.928,72.39 J7.4@185.928,68.961
SWDIO: J7.3 U5.37 | length 14.5
  Top Layer w0.254: U5.37@175.954,73.831 176.867,73.831 178.181,72.517 184.912,72.517 J7.3@188.468,68.961
VBAT: C1.1 D1.1 F1_M0.1 F1_M1.1 F1_M2.1 F5.1 J1.2 R1.1 VBAT.1
VBAT_FUSED: C9_M0.2 C9_M1.2 C9_M2.2 C10_M0.2 C10_M1.2 C10_M2.2 C11_M0.2 C11_M1.2 C11_M2.2 C12_M0.2 C12_M1.2 C12_M2.2 C13_M0.2 C13_M1.2 C13_M2.2 C14_M0.2 C14_M1.2 C14_M2.2 C15_M0.2 C15_M1.2 C15_M2.2 C24_M0.2 C24_M1.2 C24_M2.2 C25_M0.2 C25_M1.2 C25_M2.2 F1_M0.2 F1_M1.2 F1_M2.2 R4_M0.2 R4_M1.2 R4_M2.2 U1_M0.2 U1_M1.2 U1_M2.2
VBAT_LDOS: C42.2 C43.2 C44.2 C66.2 C67.2 C68.2 C69.2 C75.2 C76.2 F5.2 R12.2 U2.2
VBAT_MCU: 3V3.1 C31.2 C38.2 C39.2 C40.2 C41.2 C48.2 C49.2 C50.2 C51.2 C52.2 C53.2 C54.2 C55.2 C64_M0.1 C64_M1.1 C64_M2.1 C65_M0.1 C65_M1.1 C65_M2.1 F2.1 F3.1 F4.1 I1.2 I1.4 J7.5 R14.1 R15.1 R18.2 R19.2 U5.1 U5.20 U5.21 U5.24 U5.36 U5.48 U6.5 U9_M0.8 U9_M1.8 U9_M2.8 U10_M0.8 U10_M1.8 U10_M2.8 | length 206.8
  Top Layer w0.254: U9_M2.8@41.489,49.913 41.489,48.935 42.135,48.289 42.135,48.048 C64_M2.1@42.558,47.625 ; C64_M2.1@42.583,47.625 C64_M2.1@42.608,47.625 ; U10_M2.8@62.46,49.913 62.46,48.7 C65_M2.1@63.535,47.625 ; 63.5,46.736 63.56,46.796 C65_M2.1@63.56,47.625 ; U9_M1.8@72.282,49.978 72.282,49 72.928,48.354 72.928,48.113 C64_M1.1@73.351,47.69 ; C64_M1.1@73.376,47.69 73.376,46.766 73.406,46.736 ; U10_M1.8@93.253,49.978 93.253,48.765 C65_M1.1@94.328,47.69 ; C65_M1.1@94.353,47.69 94.353,46.744 94.361,46.736 ; U9_M0.8@103.478,49.913 103.478,48.935 104.124,48.289 104.124,48.048 C64_M0.1@104.525,47.647 ; 104.521,46.736 104.559,46.774 C64_M0.1@104.559,47.681 ; U10_M0.8@124.449,49.913 124.449,48.7 C65_M0.1@125.502,47.647 ; C65_M0.1@125.536,47.681 125.536,46.803 125.603,46.736 ; v1(164.338,72.517) 164.338,73.241 C55.2@164.757,73.66 C54.2@164.757,75.184 166.034,75.184 166.181,75.331 U5.21@167.454,75.331 ; v1(164.719,79.375) 164.719,78.27 C53.2@164.757,78.232 C52.2@164.757,76.708 165.138,76.327 165.735,76.327 166.206,75.856 167.429,75.856 U5.20@167.454,75.831 ; v1(165.481,72.517) 165.51,72.546 166.28,72.546 C49.2@166.37,72.636 166.37,73.533 166.668,73.831 U5.24@167.454,73.831 ; R14.1@168.275,64.173 168.619,63.829 169.832,63.829 169.885,63.881 v1(169.926,63.881) v1(169.926,66.167) ; R15.1@169.964,58.293 169.926,58.331 169.926,59.944 v1(169.947,59.965) 169.955,59.973 170.844,59.973 171.023,60.152 171.023,60.954 U6.5@171.196,61.127 ; U5.1@174.454,80.831 174.479,80.856 174.479,81.515 174.977,82.013 176.755,82.013 v1(176.784,82.042) ; U5.36@174.476,72.309 U5.36@174.454,72.331 174.454,71.418 174.968,70.904 174.968,70.388 C50.2@175.133,70.223 176.322,70.223 176.33,70.231 v1(177.546,70.231) ; U5.48@175.954,79.331 177.502,79.331 177.808,79.637 C48.2@177.808,80.264 177.808,81.018 v1(176.784,82.042) ; v1@176.799,82.057 v1(176.784,82.042) ; v1(178.435,70.231) 178.435,67.691 178.054,67.31 178.054,61.553 178.893,60.714 R18.2@178.943,60.714 ; J7.5@183.388,68.961 182.118,70.231 v1(179.324,70.231) 179.324,66.929 183.261,62.992 183.261,62.061 184.481,60.841 R19.2@184.531,60.841
  Top Layer w0.381: C64_M2.1@42.608,47.625 43.497,46.736 63.5,46.736 73.406,46.736 94.361,46.736 104.521,46.736 125.603,46.736 127.127,46.736 130.683,50.292 130.683,55.753 137.109,62.179 F3.1@146.05,62.179 146.05,62.204 146.41,62.563 146.435,62.563 146.774,62.903 ; I1.2@146.596,70.025 151.133,70.025 151.974,70.866 3V3.1@152.019,70.866
  Bottom Layer w0.254: v1(164.338,72.517) v1@164.338,72.558 ; v1(169.926,63.881) 169.936,63.871 169.936,59.975 v1(169.947,59.965)
  other v1: 151.892,63.119 150.876,63.468 151.384,64.008 150.876,64.643
pads on no net: J1.1@182.825,108.53 J1.1@191.825,108.53 J2.1@203.711,50.237 J2.1@203.711,59.237 J3.1@203.711,61.032 J3.1@203.711,70.032 J4.1@203.711,71.827 J4.1@203.711,80.827 J5. J6.1@203.711,82.495 J6.1@203.711,91.495 J9. J10.1@203.711,93.163 J10.1@203.711,102.163 J12.1@203.711,103.958 J12.1@203.711,112.958 J13. J14.1 J14_M0.1@115.192,50.523 J14_M0.1@115.192,56.523 J14_M1.1@84.009,50.532 J14_M1.1@84.009,56.532 J14_M2.1@53.216,50.467 J14_M2.1@53.216,56.467 J15.1 U5.6 U5.10 U5.11 U5.13 U5.15 U5.16 U5.17 U5.18 U5.22 U5.45 U7_M0.2 U7_M1.2 U7_M2.2 U8_M0.2 U8_M1.2 U8_M2.2 U9_M0.3 U9_M1.3 U9_M2.3 U10_M0.3 U10_M1.3 U10_M2.3

## Polygon pours and split planes (outlines as drawn)
VBAT_MCU on Top Layer "NONET_L-01_P-001" (solid, remove dead copper, pour order 84): 151.384,61.214 145.288,61.214 144.78,61.722 144.78,70.993 145.796,72.009 145.796,76.835 145.923,76.962 147.193,76.962 147.447,76.708 147.447,72.009 148.59,70.866 148.59,65.532 148.844,65.278 151.13,65.278 152.4,64.008 152.4,62.23
5V on Top Layer "NONET_L-01_P-001" (solid, remove dead copper, pour order 82): 135.636,76.962 135.509,77.089 134.239,77.089 134.112,76.962 134.112,72.136 132.969,70.993 132.969,63.246 132.207,62.484 132.207,61.341 132.461,61.087 135.001,61.087 136.906,62.992 136.906,70.866 135.636,72.136 135.636,73.152
7V_Buck on Top Layer "NONET_L-01_P-001" (solid, remove dead copper, pour order 81): 138.303,91.948 138.303,84.455 138.811,83.947 144.526,83.947 146.05,82.423 146.05,77.851 144.907,76.708 144.907,75.311 144.78,75.184 143.764,75.184 143.637,75.311 143.637,76.835 140.081,80.391 135.636,80.391 134.112,78.867 133.223,77.978 133.223,75.438 133.096,75.311 132.08,75.311 131.953,75.438 131.953,79.121 132.842,80.01 132.842,91.948 132.969,92.075 138.176,92.075
VBAT_LDOS on Top Layer "NONET_L-01_P-001" (solid, remove dead copper, pour order 80): 140.802,105.864 147.133,105.864 147.206,105.791 148.603,104.394 151.397,104.394 152.921,105.918 152.921,110.998 152.794,111.125 148.603,111.125 148.349,110.871 148.349,110.236 147.333,109.22 141.859,109.22 141.097,109.982 139.967,109.982 139.84,109.855 139.84,108.585 139.459,108.204 139.459,102.997 139.586,102.87 140.221,102.87 140.348,102.997 140.348,105.41
SW_2 on Top Layer "NONET_L-01_P-001" (solid, remove dead copper, pour order 78): 145.27,98.298 145.397,98.171 145.527,98.041 145.527,90.536 145.301,90.297 145.301,90.043 145.288,89.281 143.764,87.757 141.224,87.757 140.843,88.138 140.843,93.739 139.84,94.742 139.84,98.298 139.586,98.552 139.586,100.015 139.653,100.082 139.674,100.076 140.152,100.076 140.152,100.062 140.221,99.987 140.221,98.552 140.475,98.298
VBAT on Top Layer "NONET_L-01_P-001" (solid, remove dead copper, pour order 74): 156.21,105.791 154.686,107.315 154.686,111.125 153.543,112.268 137.795,112.268 132.715,107.188 128.397,107.188 128.143,107.442 128.143,110.998 126.873,112.268 106.68,112.268 101.473,107.061 97.409,107.061 96.901,107.569 96.901,111.125 95.758,112.268 75.946,112.268 70.866,107.188 66.294,107.188 66.167,107.315 66.167,112.141 69.723,115.697 184.658,115.697 186.817,113.538 186.817,109.601 186.563,109.347 181.991,109.347 181.483,108.839 181.483,106.045 181.229,105.791
M+_M0 on Top Layer "NONET_L-01_P-001" (solid, remove dead copper, pour order 59): 109.995,52.959 109.995,52.845 109.982,52.832 110.49,52.324 112.141,52.324 112.522,52.705 112.522,52.879 112.535,52.887 112.535,72.644 111.265,73.914 108.979,73.914 108.471,73.406 107.836,73.406 107.328,73.914 107.328,75.184 107.201,75.311 105.042,75.311 104.407,74.676 104.407,69.723 104.661,69.469 109.36,69.469 111.138,67.691 111.138,55.753 109.995,54.61
M-_M0 on Top Layer "NONET_L-01_P-001" (solid, remove dead copper, pour order 70): 112.916,52.959 112.903,52.946 112.903,52.705 113.284,52.324 115.189,52.324 115.57,52.705 115.576,52.826 115.583,52.832 115.583,54.483 114.313,55.753 114.313,66.802 116.98,69.469 121.425,69.469 121.679,69.723 121.679,72.2 120.028,73.85 120.028,75.184 119.901,75.311 118.123,75.311 117.996,75.184 117.996,74.041 117.869,73.914 114.821,73.914 112.916,72.009
12V_MOTOR_M0 on Top Layer "NONET_L-01_P-001" (solid, remove dead copper, pour order 71): 122.568,77.724 122.568,80.137 122.314,80.391 112.789,80.391 112.408,80.772 112.408,83.566 112.662,83.82 112.662,92.075 111.011,93.726 104.788,93.726 104.661,93.599 104.661,89.916 105.296,89.281 105.296,75.692 105.423,75.565 120.663,75.565 120.79,75.692 120.79,76.835 121.425,77.47 122.314,77.47
SW_M0 on Top Layer "NONET_L-01_P-001" (solid, remove dead copper, pour order 72): 113.043,100.004 113.039,100.007 113.077,100.045 113.575,100.039 113.679,99.935 113.678,99.933 113.678,98.552 114.059,98.171 118.504,98.171 118.758,97.917 118.758,83.82 118.504,83.566 115.202,83.566 114.948,83.82 114.948,93.091 113.297,94.742 113.297,98.298 113.043,98.552
VBAT_FUSED on Top Layer "NONET_L-01_P-001" (solid, remove dead copper, pour order 73): 114.259,105.864 120.59,105.864 120.663,105.791 122.06,104.394 124.854,104.394 126.378,105.918 126.378,110.998 126.251,111.125 122.06,111.125 121.806,110.871 121.806,110.236 120.663,109.093 115.329,109.093 114.44,109.982 113.424,109.982 113.297,109.855 113.297,108.585 112.916,108.204 112.916,102.997 113.043,102.87 113.678,102.87 113.805,102.997 113.805,105.41
M+_M0 on Top Layer "NONET_L-01_P-001" (solid, remove dead copper, pour order 46): 78.867,53.086 78.867,52.705 79.248,52.324 81.026,52.324 81.365,52.663 81.339,52.95 81.339,72.709 80.069,73.979 77.783,73.979 77.275,73.471 76.64,73.471 76.132,73.979 76.132,75.249 76.005,75.376 73.846,75.376 73.211,74.741 73.211,69.788 73.465,69.534 78.164,69.534 79.942,67.756 79.942,55.818 78.864,54.74
M-_M0 on Top Layer "NONET_L-01_P-001" (solid, remove dead copper, pour order 50): 81.723,53.021 81.723,52.643 82.042,52.324 84.074,52.324 84.328,52.578 84.327,54.609 83.117,55.818 83.117,66.867 85.784,69.534 90.229,69.534 90.483,69.788 90.483,72.265 88.832,73.916 88.832,75.249 88.705,75.376 86.927,75.376 86.8,75.249 86.8,74.106 86.673,73.979 83.625,73.979 81.72,72.074 81.72,53.024
12V_MOTOR_M1 on Top Layer "NONET_L-01_P-001" (solid, remove dead copper, pour order 51): 91.372,77.789 91.372,80.202 91.118,80.456 81.593,80.456 81.212,80.837 81.212,83.631 81.466,83.885 81.466,92.14 79.815,93.791 73.592,93.791 73.465,93.664 73.465,89.981 74.1,89.346 74.1,75.757 74.227,75.63 89.467,75.63 89.594,75.757 89.594,76.9 90.229,77.535 91.118,77.535
SW_M1 on Top Layer "NONET_L-01_P-001" (solid, remove dead copper, pour order 52): 87.308,98.236 87.562,97.982 87.562,83.885 87.308,83.631 84.006,83.631 83.752,83.885 83.752,93.156 82.101,94.807 82.101,98.363 81.847,98.617 81.847,100.014 81.902,100.069 82.428,100.069 82.482,100.014 82.482,98.617 82.863,98.236
VBAT_FUSED on Top Layer "NONET_L-01_P-001" (solid, remove dead copper, pour order 53): 83.063,105.929 89.394,105.929 89.467,105.856 90.864,104.459 93.658,104.459 95.182,105.983 95.182,111.063 95.055,111.19 90.864,111.19 90.61,110.936 90.61,110.301 89.467,109.158 84.133,109.158 83.244,110.047 82.228,110.047 82.101,109.92 82.101,108.65 81.72,108.269 81.72,103.062 81.847,102.935 82.482,102.935 82.609,103.062 82.609,105.475
VBAT_FUSED on Top Layer "NONET_L-01_P-001" (solid, remove dead copper, pour order 58): 52.27,105.864 58.601,105.864 58.674,105.791 60.071,104.394 62.865,104.394 64.389,105.918 64.389,110.998 64.262,111.125 60.071,111.125 59.817,110.871 59.817,110.236 58.674,109.093 53.34,109.093 52.451,109.982 51.435,109.982 51.308,109.855 51.308,108.585 50.927,108.204 50.927,102.997 51.054,102.87 51.689,102.87 51.816,102.997 51.816,105.41
SW_M2 on Top Layer "NONET_L-01_P-001" (solid, remove dead copper, pour order 57): 56.515,98.171 56.769,97.917 56.769,83.82 56.515,83.566 53.213,83.566 52.959,83.82 52.959,93.091 51.308,94.742 51.308,98.298 51.054,98.552 51.054,99.949 51.109,100.004 51.634,100.004 51.689,99.949 51.689,98.552 52.07,98.171
12V_MOTOR_M2 on Top Layer "NONET_L-01_P-001" (solid, remove dead copper, pour order 56): 60.579,77.724 60.579,80.137 60.325,80.391 50.8,80.391 50.419,80.772 50.419,83.566 50.673,83.82 50.673,92.075 49.022,93.726 42.799,93.726 42.672,93.599 42.672,89.916 43.307,89.281 43.307,75.692 43.434,75.565 58.674,75.565 58.801,75.692 58.801,76.835 59.436,77.47 60.325,77.47
M-_M0 on Top Layer "NONET_L-01_P-001" (solid, remove dead copper, pour order 55): 50.927,52.451 51.181,52.197 53.34,52.197 53.594,52.451 53.594,54.483 52.324,55.753 52.324,66.802 54.991,69.469 59.436,69.469 59.69,69.723 59.69,72.2 58.039,73.85 58.039,75.184 57.912,75.311 56.134,75.311 56.007,75.184 56.007,74.041 55.88,73.914 52.832,73.914 50.927,72.009
M+_M0 on Top Layer "NONET_L-01_P-001" (solid, remove dead copper, pour order 54): 48.006,52.959 48.006,52.705 48.514,52.197 50.292,52.197 50.546,52.451 50.521,52.863 50.546,52.883 50.546,72.644 49.276,73.914 46.99,73.914 46.482,73.406 45.847,73.406 45.339,73.914 45.339,75.184 45.212,75.311 43.053,75.311 42.418,74.676 42.418,69.723 42.672,69.469 47.371,69.469 49.149,67.691 49.149,55.753 48.006,54.61
GND on Top Layer "GND_L01_P086" (solid, remove dead copper, pour order 86): 29.718,50.038 29.718,112.268 cw(c33.528,112.268) 33.528,116.078 203.708,116.078 cw(c203.708,112.268) 207.518,112.268 207.518,50.038 cw(c203.708,50.038) 203.708,46.228 33.528,46.228 cw(c33.528,50.038)
NetJ1_1 on Top Layer "Polygon_Connect_1" (solid, remove dead copper, pour order 43): 183.388,104.394 183.515,104.267 185.166,104.267 185.293,104.394 190.119,109.347 190.119,111.252 189.484,111.887 188.214,111.887 187.579,111.252 187.579,109.474 183.388,105.283 183.388,104.521
5V on Bottom Layer "5V_L04_P045" (solid, remove dead copper, pour order 45): 136.906,63.246 138.049,62.103 137.668,61.722 136.271,61.722 135.636,61.087 131.191,61.087 130.683,61.595 130.683,62.23 131.699,63.246
GND on Bottom Layer "GND_L04_P049" (solid, remove dead copper, pour order 49): 29.718,50.038 29.718,112.268 cw(c33.528,112.268) 33.528,116.078 203.708,116.078 cw(c203.708,112.268) 207.518,112.268 207.518,50.038 cw(c203.708,50.038) 203.708,46.228 33.528,46.228 cw(c33.528,50.038)
VBAT_MCU on Bottom Layer "VBAT_MCU_L04_P044" (solid, remove dead copper, pour order 44): 166.814,70.929 165.989,71.755 165.989,72.771 165.608,73.152 165.608,79.883 167.132,81.407 177.292,81.407 177.673,81.788 177.673,82.423 177.419,82.677 165.735,82.677 163.005,79.947 163.005,73.343 160.338,70.675 157.671,70.675 155.448,70.612 150.241,65.405 150.241,62.992 150.876,62.357 152.527,62.357 157.861,67.691 166.497,67.691 168.402,65.786 170.18,65.786 171.874,67.48 171.874,69.004 173.482,70.612 175.768,70.612 177.038,69.342 179.197,69.342 179.726,69.85 179.726,71.099 179.07,71.755 169.037,71.755 168.212,70.929
GND on Layer 2 (GND) "GND_L02_P047" (solid, remove dead copper, pour order 47): 29.718,50.038 29.718,112.268 cw(c33.528,112.268) 33.528,116.078 203.708,116.078 cw(c203.708,112.268) 207.518,112.268 207.518,50.038 cw(c203.708,50.038) 203.708,46.228 33.528,46.228 cw(c33.528,50.038)
GND on Layer 3 (GND) "GND_L03_P048" (solid, remove dead copper, pour order 48): 29.718,50.038 29.718,112.268 cw(c33.528,112.268) 33.528,116.078 203.708,116.078 cw(c203.708,112.268) 207.518,112.268 207.518,50.038 cw(c203.708,50.038) 203.708,46.228 33.528,46.228 cw(c33.528,50.038)

## Silkscreen, mask and mechanical layers (free items; w line width, h text height)
Top Overlay:
  lines w0.254: 46.482,57.277 55.753,57.277 ; 77.275,57.342 86.546,57.342 ; 108.458,57.333 117.729,57.333 ; 141.859,48.514 141.859,59.309 ; 141.859,57.404 141.859,59.309 ; 155.575,48.514 155.575,59.309 ; 155.575,57.404 155.575,59.309 ; 167.132,59.309 155.575,59.309 ; 167.229,57.388 167.229,59.293 ; 169.545,54.229 195.199,54.229 ; 169.545,56.388 183.134,56.388 ; 183.134,48.514 183.134,56.388 ; 195.072,56.388 183.134,56.388 ; 195.199,61.214 197.231,61.214 ; 195.199,70.993 206.121,70.993 ; 195.199,92.329 206.121,92.329 ; 195.199,103.124 206.121,103.124 ; 195.262,81.597 206.121,81.597 ; 197.231,54.229 195.199,54.229 ; 197.231,60.198 206.121,60.198 ; 197.231,113.665 197.231,49.53 ; 128.27,57.404 128.27,48.514 169.545,48.514 ; 128.27,57.404 169.545,57.404 169.545,48.514 ; 128.27,57.404 128.27,59.309 141.859,59.309 ; 141.859,59.309 155.575,59.309 ; 169.545,48.514 197.231,48.514 197.231,49.53 ; 181.864,107.696 192.786,107.696 ; 181.864,107.696 181.864,105.918 192.786,105.918 192.786,107.696 ; 181.864,107.696 181.864,113.665 192.278,113.665 192.786,113.665 192.786,107.696 ; 195.199,54.229 195.199,113.665 206.121,113.665 206.121,49.53 197.231,49.53 ; 37.211,46.736 65.405,46.736 65.405,111.887 37.211,111.887 37.211,46.736 ; 46.482,49.657 55.753,49.657 55.753,59.055 46.482,59.055 46.482,49.657 ; 61.214,96.266 64.516,96.266 64.516,99.187 61.214,99.187 61.214,96.266 ; 68.004,46.863 96.198,46.863 96.198,111.952 68.004,111.952 68.004,46.863 ; 77.275,49.722 77.275,59.12 86.546,59.12 86.546,49.722 77.275,49.722 ; 92.007,96.331 95.309,96.331 95.309,99.252 92.007,99.252 92.007,96.331 ; 99.187,46.863 127.381,46.863 127.381,111.943 99.187,111.943 99.187,46.863 ; 108.458,49.713 117.729,49.713 117.729,59.111 108.458,59.111 108.458,49.713 ; 123.19,96.322 126.492,96.322 126.492,99.243 123.19,99.243 123.19,96.322 ; 149.733,96.322 153.035,96.322 153.035,99.243 149.733,99.243 149.733,96.322
  text "+VBAT-" at 184.447,106.299 h1.02
  text "LIM_2" at 196.681,105.026 h1.02 r90
  text "12V" at 92.389,97.22 h1.02
  text "12V" at 123.571,97.211 h1.02
  text "7V" at 150.538,97.211 h1.02
  text "12V" at 61.595,97.155 h1.02
  text "LIM_1" at 196.638,95.547 h1.02 r90
  text "LIM_0" at 196.765,84.837 h1.02 r90
  text "LIM_A GND" at 193.386,84.279 h0.76 r90
  text "LIM_B GND" at 194.627,84.266 h0.76 r90
  text "QUAD_B 5V" at 194.627,74.55 h0.76 r90
  text "QUAD_A GND" at 193.386,74.183 h0.76 r90
  text "QUAD_2" at 196.765,73.195 h1.02 r90
  text "3V3" at 183.769,70.993 h0.76 r90
  text "NRST" at 191.389,70.993 h0.76 r90
  text "GND" at 193.929,70.993 h0.76 r90
  text "SWDIO" at 188.722,70.93 h0.76 r90
  text "SWCLK" at 186.309,70.867 h0.76 r90
  text "TX" at 179.578,64.643 h0.76
  text "RX" at 185.039,64.643 h0.76
  text "QUAD_1" at 196.638,62.443 h1.02 r90
  text "GND" at 165.1,60.96 h0.76
  text "3V3 SDA 3V3" at 130.938,60.706 h0.76
  text "3V3" at 152.654,60.706 h0.76
  text "GND" at 165.1,59.817 h0.76
  text "GND SCL 3V3" at 130.938,59.69 h0.76
  text "GND" at 152.654,59.69 h0.76
  text "ABS_0" at 132.758,57.87 h1.02
  text "ABS_1" at 146.516,57.87 h1.02
  text "ABS_2" at 159.809,57.87 h1.02
  text "+ M1 -" at 79.118,57.723 h1.02
  text "+ M0 -" at 110.216,57.714 h1.02
  text "+ M2 -" at 48.24,57.658 h1.02
  text "GND CANH CANL" at 184.406,56.769 h0.76
  text "QUAD_0" at 196.638,55.034 h1.02 r90
  text "CAN_0" at 173.618,54.858 h1.02
  text "CAN_1" at 186.648,54.822 h1.02
Bottom Overlay:
  drawing of 2624 lines, arcs and shapes, not listed
  text "JD NV" at 184.785,77.851 h2.54
Mechanical 1:
  the board outline again, w0.254